# Altium PCB Wings_SMD_Breakout_v1.1.PcbDoc (part 1 of 2)
Units mm, origin at the board's own origin, x right, y up, seen from the top; angles counter-clockwise.
Board outline 50.8 x 30 mm, 2 copper layers (Top Layer, Bottom Layer), stack 1.569 mm thick; 52 components, 60 nets, 219 pads, 125 vias.
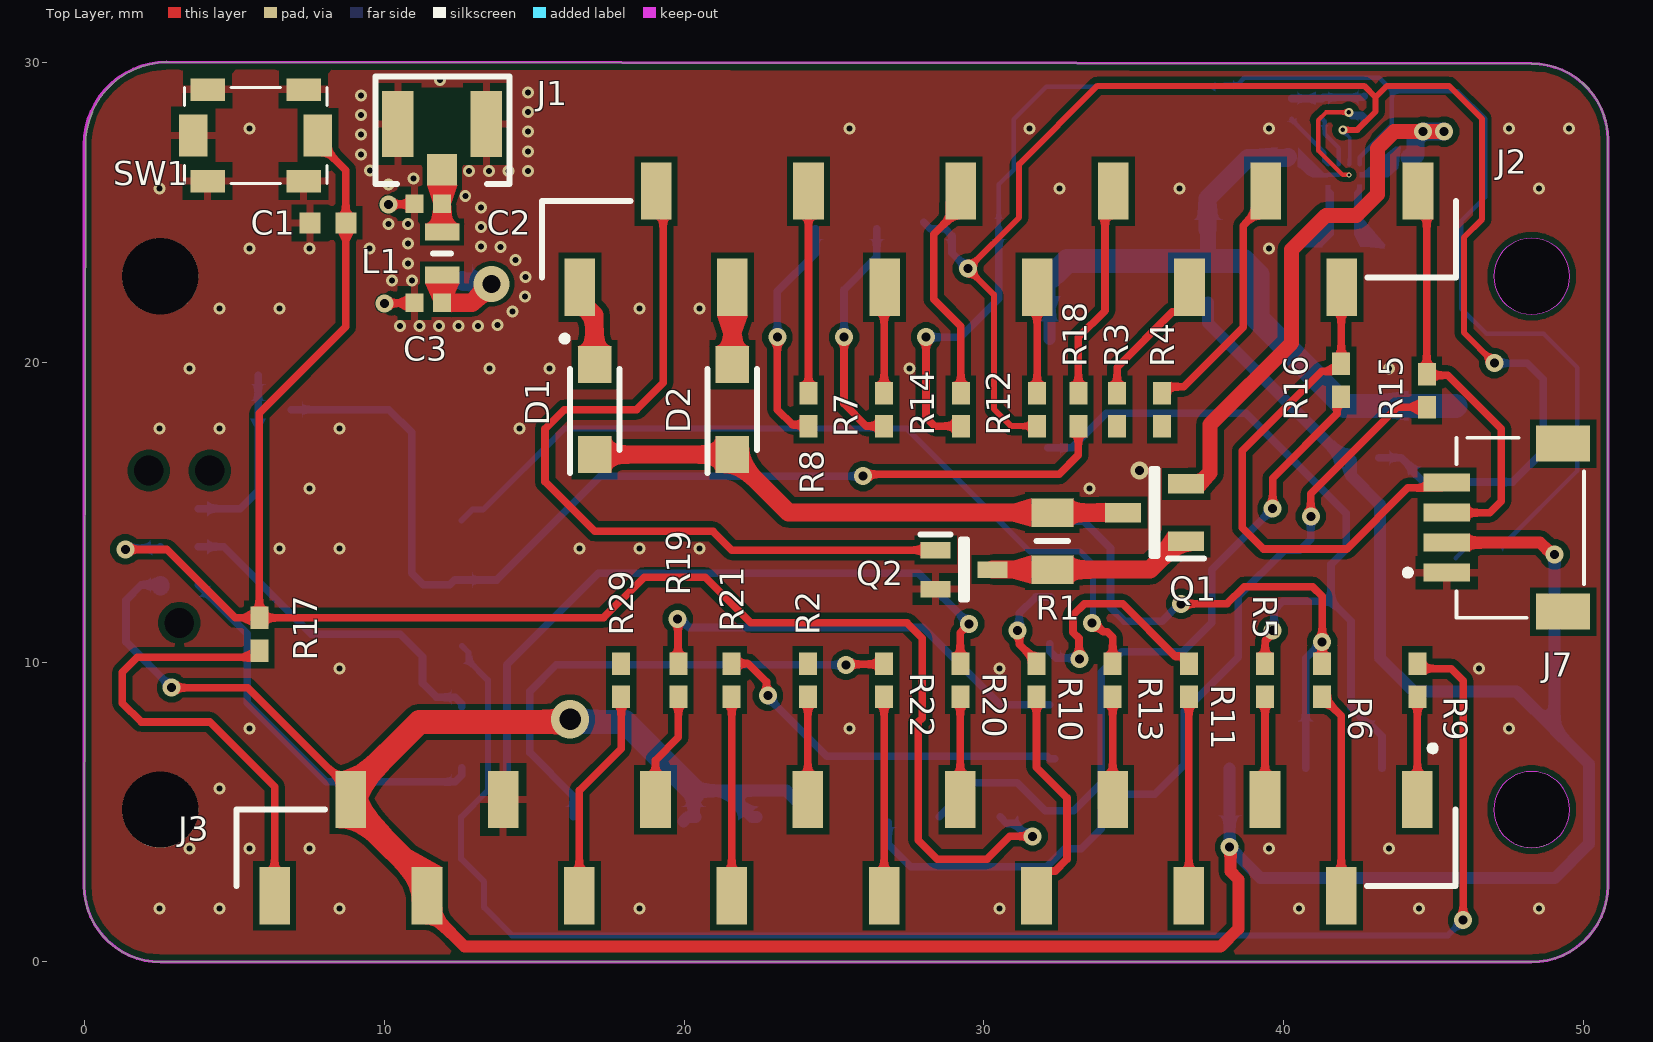
[diagram p0: Top Layer view]
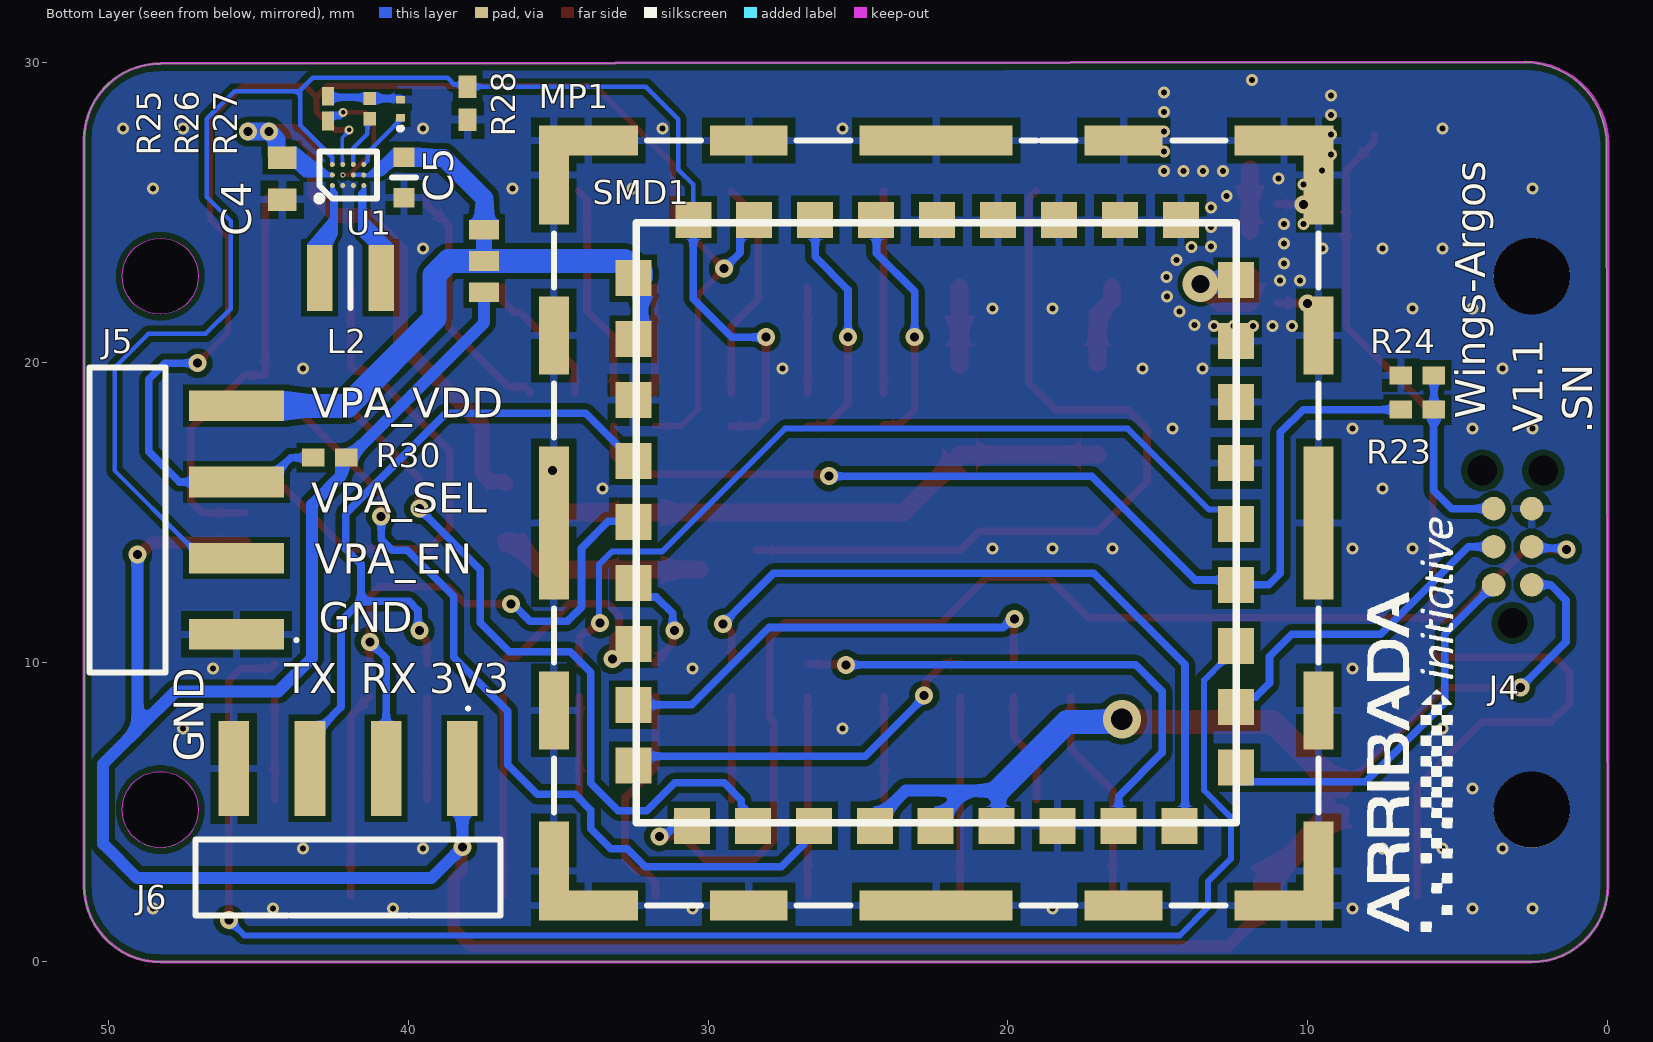
[diagram p1: Bottom Layer view, seen from below]
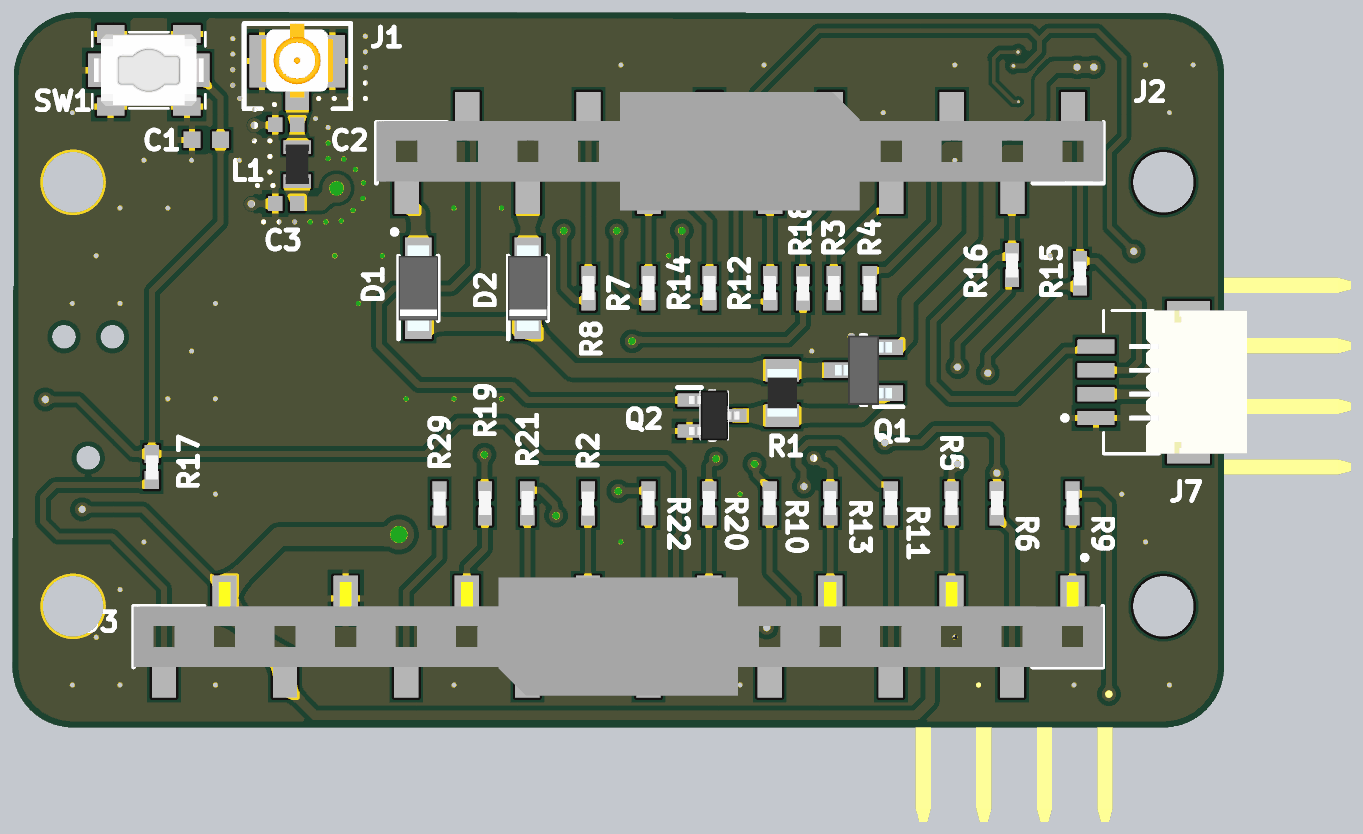
[diagram p2: 3D render of the assembled board from above, using the file's embedded part models]
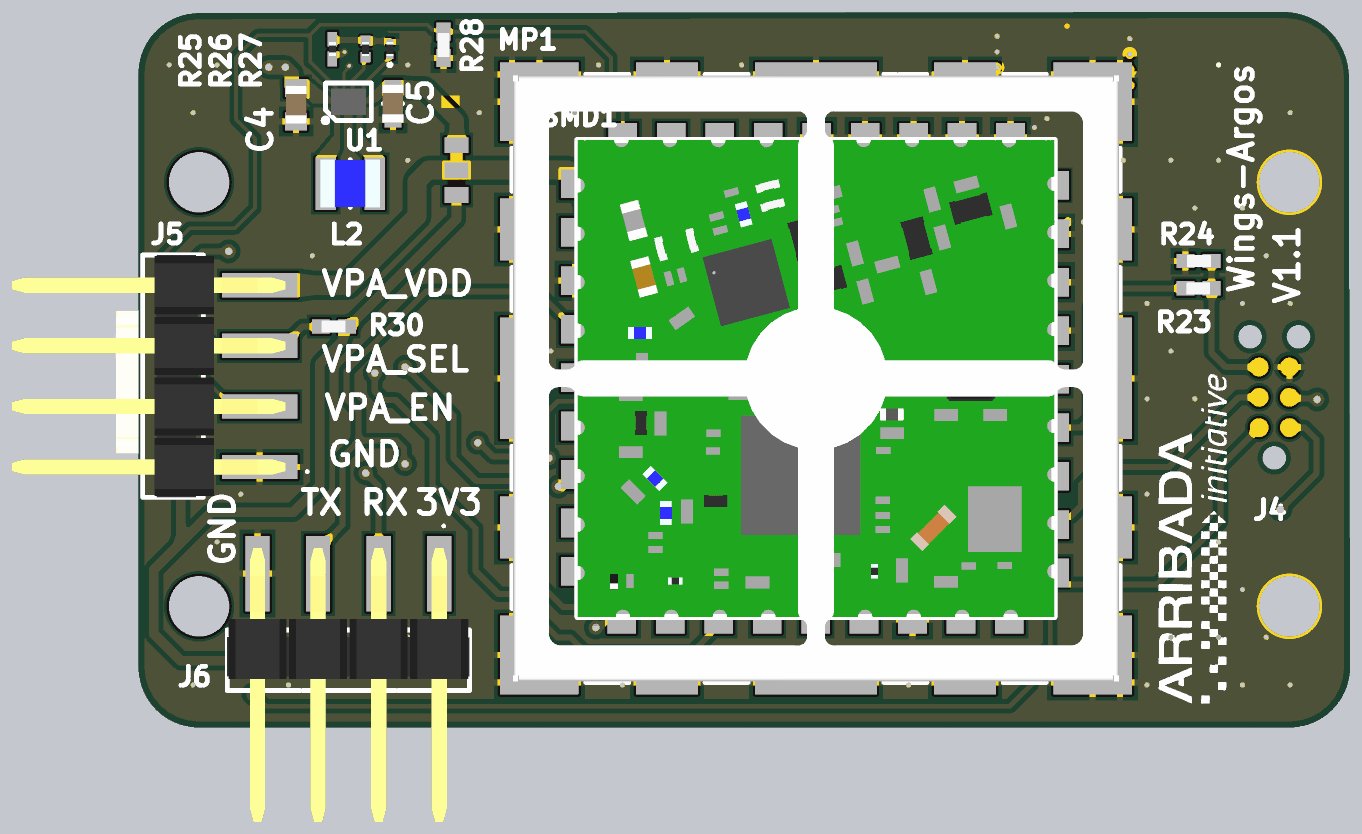
[diagram p3: 3D render of the assembled board from below, using the file's embedded part models]

## Layer stack, top to bottom
Top Solder: solder mask 0.0254, SM-001, Dk 4
Top Layer: signal copper 0.035
Dielectric 1: core 1.4986, Core-043, Dk 4.3
Bottom Layer: signal copper 0.035
Bottom Solder: solder mask 0.0254, SM-001, Dk 4

## Board outline
2.54,0 cw(c2.54,2.54) 0,2.54 0.05,27.246 cw(c2.804,27.246) 2.804,30 48.26,29.95 cw(c48.26,27.41) 50.8,27.41 50.8,2.54 cw(c48.26,2.54) 48.26,0
cut-out: 48.26,3.81 ccw(c48.26,5.08) 49.53,5.08 ccw(c48.26,5.08) 48.26,6.35 ccw(c48.26,5.08) 46.99,5.08 ccw(c48.26,5.08)
cut-out: 48.26,21.59 ccw(c48.26,22.86) 49.53,22.86 ccw(c48.26,22.86) 48.26,24.13 ccw(c48.26,22.86) 46.99,22.86 ccw(c48.26,22.86)

## Design rules (kind name [scope] priority, off if disabled: settings)
AcuteAngle [All] p1: minimum=6.00000000000000E+0001 checktracksonly=FALSE
Clearance Clearance_1 [TouchesRoom('Room_opt') and InNet('VPA_VDD') vs TouchesRoom('Room_opt') and InNet('NetC5_1')] p1: gap=0 ignorepadtopadclearanceinfootprint=FALSE
Clearance Clearance_Pad_TPS [TouchesRoom('TPS63901')] p2: gap=0.15 ignorepadtopadclearanceinfootprint=FALSE except(0.254: Hole-Hole)
Clearance Clearance_RF [InNetClass('50Ohms')] p3: gap=0.15 ignorepadtopadclearanceinfootprint=FALSE
Clearance [All] p4: gap=0.2 ignorepadtopadclearanceinfootprint=FALSE except(0.15: Arc-SMDPad Track-SMDPad SMDPad-SMDPad THPad-THPad; 0.254: Hole-Hole)
MinimumSolderMaskSliver [All] p1: minsoldermaskwidth=0.1
PlaneClearance PlaneClearance_GND [InNet('GND')] p1: clearance=0
PlaneClearance [All] p2: clearance=0.508
PlaneConnect PlaneConnect_GND [InNet('GND')] p1: pad.planeconnectstyle=Relief pad.reliefexpansion=0.508 pad.reliefentries=4 pad.reliefconductorwidth=0.254 pad.reliefairgap=0.254 via.planeconnectstyle=Direct via.reliefexpansion=0.508 via.reliefentries=4 via.reliefconductorwidth=0.254 via.reliefairgap=0.254
PlaneConnect [All] p2: planeconnectstyle=Relief reliefexpansion=0.508 reliefentries=4 reliefconductorwidth=0.254 reliefairgap=0.254
PolygonConnect PolygonConnect_GND_TPS [(ObjectKind = 'Pad') And (Net = 'GND') And (Component = 'U1') vs InNet('GND')] p1: connectstyle=Direct reliefconductorwidth=0.254 reliefentries=4 polygonreliefangle="90 Angle" airgapwidth=0.254
PolygonConnect PolygonConnect_GND [InNet('GND') vs InNet('GND')] p2: thpad.connectstyle=Direct thpad.reliefconductorwidth=0.254 thpad.reliefentries=4 thpad.polygonreliefangle="90 Angle" thpad.airgapwidth=0.254 smdpad.connectstyle=Relief smdpad.reliefconductorwidth=0.254 smdpad.reliefentries=4 smdpad.polygonreliefangle="90 Angle" smdpad.airgapwidth=0.254 via.connectstyle=Direct via.reliefconductorwidth=0.254 via.reliefentries=4 via.polygonreliefangle="90 Angle" via.airgapwidth=0.254
PolygonConnect [All] p3: connectstyle=Relief reliefconductorwidth=0.254 reliefentries=4 polygonreliefangle="90 Angle" airgapwidth=0.254
RoomDefinition Room_opt [False vs False] p1: confinementstyle=ConfineIn formatcopy=TRUE lockcomponents=FALSE outline 36.529,21.831 38.199,21.831 38.199,25.187 36.529,25.187
RoomDefinition TPS63901 [False] p2: confinementstyle=ConfineIn formatcopy=TRUE lockcomponents=FALSE outline 40.767,25.538 43.484,25.538 43.484,27.305 40.767,27.305
RoutingPriority RoutingPWR [InNetClass('PWR')] p1: routingpriority=0
RoutingPriority RoutingDBG [InNetClass('UART')] p2: routingpriority=1
RoutingPriority RoutingSPI [All] p3: routingpriority=3
RoutingPriority RoutingI2C [All] p4: routingpriority=2
RoutingPriority RoutingDiGI [All] p5: routingpriority=5
RoutingPriority RoutingANALOG [All] p6: routingpriority=4
RoutingPriority RoutingALL [All] p7: routingpriority=6
RoutingVias [All] p1: holewidth=0.711 width=1.27 viastyle="Through Hole" minholewidth=0.3 minwidth=0.6 maxholewidth=0.711 maxwidth=1.27
ShortCircuit ShortCircuit_1 [TouchesRoom('Room_opt') and InNet('VPA_VDD') vs TouchesRoom('Room_opt') and InNet('NetC5_1')] p1: allowed=TRUE
ShortCircuit [All] p2: allowed=FALSE
SilkToSolderMaskClearance [IsPad] p1: minsilkscreentomaskgap=0 clearancetoexposedcopper=TRUE
SolderMaskExpansion SolderMaskExpansion_VIA_tented [(ObjectKind = 'Via')] p1: expansion=0.102 istentingtop=TRUE
SolderMaskExpansion [All] p2: expansion=0.102 istentingtop=FALSE
SupplyNets "Schematic Supply Nets_6" [InNet('VBAT')] p1: voltage=0.000
SupplyNets "Schematic Supply Nets_5" [InNet('GND')] p2: voltage=0.000
SupplyNets "Schematic Supply Nets_4" [InNet('VDD')] p3: voltage=0.000
SupplyNets "Schematic Supply Nets_2" [InNet('VPA_VDD')] p4: voltage=0.000
SupplyNets "Schematic Supply Nets_1" [InNet('F_3V3')] p5: voltage=0.000
SupplyNets "Schematic Supply Nets" [InNet('VBUS')] p6: voltage=0.000
Width Width_RF [InNetClass('50Ohms')] p1: maxlimit=0.8 minlimit=0.254 preferedwidth=0.6 minimp=50.000000 maximp=50.000000 favimp=50.000000
Width [All] p2: maxlimit=1 minlimit=0.1 preferedwidth=0.254 minimp=50.000000 maximp=50.000000 favimp=50.000000
24 further rules are at their usual default settings.

## Classes and differential pairs
net class 50Ohms: NetC2_2 NetC3_1
component class U_TPS63901: C4 C5 L2 R25 R26 R27 U1

## Components (designator, comment, footprint, x,y, rotation, side; value= is the part's Value field where it differs from the comment)
C1 "GRM155R71C104KA88D" 0402 7.493,24.638 r0 top value=100nF
C2 "NC" CAPC1005X55N 11.478,25.273 r0 top
C3 "CC0402BRNPO9BN3R6" CAPC1005X55N 11.478,21.971 r180 top value=3.6pF
C4 "GRM188R61A106MAALJ" CAPC1608X90N 44.194,26.113 r270 bottom value=10uF (schematic designator C1)
C5 "GRM188R61A226ME15D" GRM18x 40.132,26.158 r270 bottom value=22uF (schematic designator C2)
D1 "MBR120LSFT3G" SODFL3616X98N 17.018,18.415 r90 top
D2 "MBR120LSFT3G" SODFL3616X98N 21.61,18.415 r90 top
J1 "20279-001E-01" "MHF SMT REC" 11.938,27.94 r270 top
J2 "SSM-112-F-SV-P-TR" SAMTEC_SSM-112-F-SV-P-TR 30.5,24.096 r180 top
J3 "SSM-116-F-SV-P-TR" SAMTEC_SSM-116-F-SV-P-TR 25.4,3.81 r0 top
J4 "TC2030-NL" TC2030NL 3.175,11.303 r90 bottom
J5 "M20-8890445R" M208890445R 51.173,14.732 r90 bottom
J6 "M20-8890445R" M208890445R 42,1 r0 bottom (schematic designator J7)
J7 "PRT-14417" SPARKFUN_PRT-14417 47.879,14.478 r90 top (schematic designator J6)
L1 "LQW18AN18NG8ZD" LQW18AN10NG80D 11.938,23.622 r90 top value=18nH
L2 "DFE252012F-2R2M=P2" DFE2HCAH1R0MJ0L 41.922,22.809 r180 bottom value=2.2uH (schematic designator L1)
MP1 "36103255S" 36103255S 22.392,14.638 r180 bottom
Q1 "DMG3415U-7" SOT96P240X120-3N 35.687,14.981 r180 top
Q2 "BSS138BKW,115" SOT65P210X110-3N 29.337,13.081 r0 top
R1 "RC0805JR07100KL" RESC2012X60N 32.278,14.031 r270 top value=100kR
R2 "0R" RESC1005X40N 24.13,9.398 r270 top value=0mR
R3 "0R" RESC1005X40N 34.437,18.415 r90 top value=0mR
R4 "0R" RESC1005X40N 35.941,18.415 r90 top value=0mR
R5 "0R" RESC1005X40N 39.37,9.398 r90 top value=0mR
R6 "0R" RESC1005X40N 41.275,9.398 r90 top value=0mR
R7 "0R" RESC1005X40N 26.67,18.415 r90 top value=0mR
R8 "0R" RESC1005X40N 24.15,18.415 r90 top value=0mR
R9 "0R" RESC1005X40N 44.45,9.398 r90 top value=0mR (schematic designator R13)
R10 "0R" RESC1005X40N 31.75,9.398 r90 top value=0mR (schematic designator R19)
R11 "0R" RESC1005X40N 36.83,9.398 r90 top value=0mR (schematic designator R20)
R12 "0R" RESC1005X40N 31.77,18.415 r90 top value=0mR (schematic designator R9)
R13 "0R" RESC1005X40N 34.29,9.398 r90 top value=0mR (schematic designator R11)
R14 "0R" RESC1005X40N 29.23,18.415 r90 top value=0mR (schematic designator R10)
R15 "0R" RESC1005X40N 44.762,19.047 r270 top value=0mR (schematic designator R14)
R16 "0R" RESC1005X40N 41.91,19.388 r270 top value=0mR
R17 "0R" RESC1005X40N 5.842,10.922 r270 top value=0mR
R18 "0R" RESC1005X40N 33.147,18.415 r270 top value=0mR (schematic designator R12)
R19 "0R" RESC1005X40N 19.812,9.398 r90 top value=0mR (schematic designator R21)
R20 "0R" RESC1005X40N 29.21,9.398 r90 top value=0mR (schematic designator R15)
R21 "0R" RESC1005X40N 21.59,9.398 r90 top value=0mR (schematic designator R22)
R22 "0R" RESC1005X40N 26.67,9.398 r90 top value=0mR (schematic designator R18)
R23 "0R" RESC1005X40N 6.35,18.415 r0 bottom value=0mR
R24 "0R" RESC1005X40N 6.35,19.558 r180 bottom value=0mR
R25 "CRCW020136K5FNED" RESC0603X28N 42.672,28.448 r90 bottom value=36.5KR (schematic designator R1)
R26 "RC0201FR-070RL" RESC0603X26N 41.275,28.448 r90 bottom value=0R (schematic designator R2)
R27 "ERJ-1GNF1622C" ERJ1GN_(0201) 40.259,28.448 r90 bottom value=16.2kR (schematic designator R3)
R28 "CRCW040210K0JNEDC" RESC1005X40N 38.01,28.629 r270 bottom value=10kR (schematic designator R26)
R29 "0R" RESC1005X40N 17.907,9.398 r270 top value=0mR (schematic designator R25)
R30 "CRCW040210K0JNEDC" RESC1005X40N 42.609,16.812 r0 bottom value=10kR (schematic designator R27)
SMD1 "stm32wl-SMD" stm32wl-SMD_shortlegs 32.392,4.638 r180 bottom
SW1 "PTS820J2x" TL1015 5.715,27.559 r0 top
U1 "TPS63901YCJR" BGA12C35P3X4_111X146X35 42.001,26.238 r90 bottom

## Footprints (in the part's own frame and the unit in brackets; to place one, negate y for a bottom-side part, rotate by r counter-clockwise, add the part's x,y. Pads: shape width x height; smd on the part's side, far side on the other; paste and mask are expansions set on the pad)
0402 [mm]
  rect 0.7x0.7 smd: 1(0.035,0) 2(1.233,0)
  body extent -0.38,-0.36 1.65,0.36, height 0.82
36103255S [mm] "Shielding Cabinet, SMD Frame, 25.4x25.4mm"
  rect 1x3.3 smd: 1(-12.75,-11.6) 1(-12.75,11.6) 1(12.75,-11.6) 1(12.75,11.6)
  rect 1x2.6 smd: 1(-12.75,-6.25) 1(-12.75,6.25) 1(12.75,-6.25) 1(12.75,6.25)
  rect 1x5.1 smd: 1(-12.75,0) 1(12.75,0)
  rect 3.3x1 smd: 1(-11.6,-12.75) 1(-11.6,12.75) 1(11.6,-12.75) 1(11.6,12.75)
  rect 2.6x1 smd: 1(-6.25,-12.75) 1(-6.25,12.75) 1(6.25,-12.75) 1(6.25,12.75)
  rect 5.1x1 smd: 1(0,-12.75) 1(0,12.75)
  silkscreen extent -12.75,-12.75 12.75,12.75, body extent -12.7,-12.7 12.7,12.7, height 3.2
BGA12C35P3X4_111X146X35 [mm]
  round 0.169 smd: A1(-0.35,0.525) A2(0,0.525) A3(0.35,0.525) B1(-0.35,0.175) B2(0,0.175) B3(0.35,0.175) C1(-0.35,-0.175) C2(0,-0.175) C3(0.35,-0.175) D1(-0.35,-0.525) D2(0,-0.525) D3(0.35,-0.525)
  silkscreen extent -0.88,-0.96 0.78,1.06, body extent -0.56,-0.73 0.56,0.73, height 0.35
CAPC1005X55N [mm]
  rect 0.6x0.62 smd: 1(-0.46,0) 2(0.46,0)
  body extent -0.5,-0.25 0.5,0.25, height 0.55
CAPC1608X90N [mm]
  rect 0.75x0.94 smd: 1(-0.7,0) 2(0.7,0)
  body extent -0.8,-0.45 0.8,0.45, height 0.8
DFE2HCAH1R0MJ0L [mm]
  rect 0.85x2.2 smd: 1(-1.025,0) 2(1.025,0)
  silkscreen extent 0,-1 0,1, body extent -1.25,-1 1.25,1, height 1.2
ERJ1GN_(0201) [mm]
  rect 0.25x0.3 smd: 1(-0.3,0) 2(0.3,0)
  silkscreen extent -0.7,-0.05 -0.63,0.05, body extent -0.3,-0.15 0.3,0.15, height 0.23
GRM18x [mm]
  rect 0.65x0.7 smd: 1(-0.675,0) 2(0.675,0)
  silkscreen extent 0,-0.4 0,0.4, body extent -0.8,-0.45 0.8,0.45, height 0.8
LQW18AN10NG80D [mm]
  rect 0.57x1.15 smd: 1(-0.715,0) 2(0.715,0)
  silkscreen extent 0,-0.3 0,0.3, body extent -0.82,-0.5 0.82,0.5, height 0.9
M208890445R [mm]
  rect 1.02x3.17 smd: 1(-3.81,-5.453) 2(-1.27,-5.453) 3(1.27,-5.453) 4(3.81,-5.453)
  silkscreen extent -5.08,-7.5 5.08,-0.55, body extent -5.08,-6.54 5.08,4.96, height 2.5
"MHF SMT REC" [mm]
  rect 1.05x1 smd: 1(1.525,0)
  rect 2.2x1.05 smd: 2(0,1.475) 3(0,-1.475)
  Top Layer pour cut-out: -1.2,0.95 1,0.95 1,-0.95 -1.2,-0.95
  silkscreen extent -1.58,-2.22 2,2.25, body extent -1.57,-1.5 1.53,1.5, height 1.27
RESC0603X26N [mm]
  rect 0.44x0.42 smd: 1(-0.34,0) 2(0.34,0)
  body extent -0.3,-0.15 0.3,0.15, height 0.26
RESC0603X28N [mm]
  rect 0.625x0.4 smd: 1(-0.412,0) 2(0.412,0)
  body extent -0.3,-0.15 0.3,0.15, height 0.28
RESC1005X40N [mm]
  rect 0.75x0.6 smd: 1(-0.55,0) 2(0.55,0)
  body extent -0.49,-0.25 0.51,0.25, height 0.35
RESC2012X60N [mm]
  rect 0.95x1.4 smd: 1(-0.95,0) 2(0.95,0)
  silkscreen extent 0,-0.53 0,0.53, body extent -1,-0.63 1,0.63, height 0.6
SAMTEC_SSM-112-F-SV-P-TR [mm]
  rect 1.02x1.905 smd: 01(13.97,1.603) 02(11.43,-1.603) 03(8.89,1.603) 04(6.35,-1.603) 05(3.81,1.603) 06(1.27,-1.603) 07(-1.27,1.603) 08(-3.81,-1.603) 09(-6.35,1.603) 10(-8.89,-1.603) 11(-11.43,1.603) 12(-13.97,-1.603)
  silkscreen extent -15.24,-1.27 15.24,3.41, body extent -15.24,-2.54 15.24,2.41, height 8.64
SAMTEC_SSM-116-F-SV-P-TR [mm]
  rect 1.02x1.905 smd: 01(19.05,1.603) 02(16.51,-1.603) 03(13.97,1.603) 04(11.43,-1.603) 05(8.89,1.603) 06(6.35,-1.603) 07(3.81,1.603) 08(1.27,-1.603) 09(-1.27,1.603) 10(-3.81,-1.603) 11(-6.35,1.603) 12(-8.89,-1.603) 13(-11.43,1.603) 14(-13.97,-1.603) 15(-16.51,1.603) 16(-19.05,-1.603)
  silkscreen extent -20.32,-1.27 20.32,3.41, body extent -20.32,-2.48 20.32,2.48, height 8.64
SODFL3616X98N [mm]
  rect 1.24x1.12 smd: 1(-1.5,0) 2(1.5,0)
  silkscreen extent -2.12,-0.82 1.35,0.82, body extent -1.8,-0.82 1.8,0.82, height 0.98
SOT65P210X110-3N [mm]
  rect 1x0.55 smd: 1(-0.95,0.65) 2(-0.95,-0.65) 3(0.95,0)
  silkscreen extent -1.45,-1 0.1,1.17, body extent -0.96,-1.05 1.14,1.05, height 0.93
SOT96P240X120-3N [mm]
  rect 1.2x0.65 smd: 1(-1.05,0.96) 2(-1.05,-0.96) 3(1.05,0)
  silkscreen extent -1.65,-1.45 0.1,1.54, body extent -1.2,-1.45 1.2,1.45, height 1.2
SPARKFUN_PRT-14417 [mm]
  rect 0.6x1.55 smd: 1(-1.5,2.45) 2(-0.5,2.45) 3(0.5,2.45) 4(1.5,2.45)
  rect 1.2x1.8 smd: S1(-2.8,-1.425) S2(2.8,-1.425)
  silkscreen extent -3,-2.12 3,3.85, body extent -3,-3.9 3,1.05, height 3.25
stm32wl-SMD_shortlegs [mm]
  rect 1.2x1.2 smd: 0(-0.1,1.905) 1(-0.1,3.937) 2(-0.1,5.969) 3(-0.1,8.001) 4(-0.1,10.033) 5(-0.1,12.065) 6(-0.1,14.097) 7(-0.1,16.129) 8(-0.1,18.161) 9(1.9,20.1) 10(3.932,20.1) 11(5.964,20.1) 12(7.996,20.1) 13(10.028,20.1) 14(12.06,20.1) 15(14.092,20.1) 16(16.124,20.1) 17(18.156,20.1) 18(20,18.095) 19(20,16.063) 20(20,14.031) 21(20,11.999) 22(20,9.967) 23(20,7.935) 24(20,5.903) 25(20,3.871) 26(20,1.839) 27(18.111,-0.1) 28(16.079,-0.1) 29(14.047,-0.1) 30(12.015,-0.1) 31(9.983,-0.1) 32(7.951,-0.1) 33(5.919,-0.1) 34(3.887,-0.1) 35(1.855,-0.1)
  silkscreen extent 0,0 20,20, body extent 0,0 20,20, height 2.05
TC2030NL [mm]
  round 0.787 smd paste-0.787: 1(1.27,-0.635) 2(1.27,0.635) 3(2.54,-0.635) 4(2.54,0.635) 5(3.81,-0.635) 6(3.81,0.635)
  round 0.65 hole 0.991 unplated: H1(0,0) H2(5.08,1.016) H3(5.08,-1.016)
TL1015 [mm]
  rect 0.95x1.4 smd: 1(-2.075,0) 2(2.075,0)
  rect 1.15x0.75 smd: G1(-1.6,1.525) G2(1.6,1.525) G3(1.6,-1.525) G4(-1.6,-1.525)
  silkscreen extent -2.37,-1.6 2.37,1.6, body extent -2.3,-1.5 2.3,1.5, height 2

## Part data
C1: "Multilayer Ceramic Capacitors MLCC - SMD/SMT 0.1 uF 16 VDC 10% 0402 X7R", Capacitance=100nF, Case Code (Imperial)=0402, Case Code (Metric)=1005, Dielectric=X7R, Dielectric Material=Ceramic, Manufacturer=YAGEO, Manufacturer 1=Murata, Manufacturer_Part_Number=CC0402KRX7R7BB104, Max Operating Temperature=125°C, Min Operating Temperature=-55°C, Package=C0402, Package Quantity=1, Supplier Part Number 1=81-GRM155R71C104KA88, TOLERANCE=10%, Voltage=16V, Case/Package=0402, Category 1="Ceramic Capacitors", ComponentLink1Description=https://datasheet.ciiva.com/129/grm155r71c104ka88-01-129739.pdf?src-supplier=Digi-Key, ComponentLink1URL=https://datasheet.ciiva.com/129/grm155r71c104ka88-01-129739.pdf?src-supplier=Digi-Key, ComponentLink2Description=https://datasheet.ciiva.com/129/grm155r71c104ka88-01-129740.pdf?src-supplier=Digi-Key, ComponentLink2URL=https://datasheet.ciiva.com/129/grm155r71c104ka88-01-129740.pdf?src-supplier=Digi-Key, ComponentLink3Description=https://datasheet.ciiva.com/29199/454098-da-01-en-vs-kondensator-0402-29199799.pdf?src-supplier=Conrad, ComponentLink3URL=https://datasheet.ciiva.com/29199/454098-da-01-en-vs-kondensator-0402-29199799.pdf?src-supplier=Conrad, ComponentLink4Description=https://datasheet.ciiva.com/7937/4360-7937615.pdf?src-supplier=Element14, ComponentLink4URL=https://datasheet.ciiva.com/7937/4360-7937615.pdf?src-supplier=Element14, ComponentLink5Description=https://datasheet.ciiva.com/14116/grmseries-highdielectrictype-eng-14116878.pdf?src-supplier=Distrelec, ComponentLink5URL=https://datasheet.ciiva.com/14116/grmseries-highdielectrictype-eng-14116878.pdf?src-supplier=Distrelec, ComponentLink6Description=https://datasheet.ciiva.com/14103/grmseries-highdielectrictype-eng-14103750.pdf?src-supplier=Distrelec, ComponentLink6URL=https://datasheet.ciiva.com/14103/grmseries-highdielectrictype-eng-14103750.pdf?src-supplier=Distrelec, ComponentLink7Description=https://datasheet.ciiva.com/28534/4360-28534127.pdf?src-supplier=Element14, ComponentLink7URL=https://datasheet.ciiva.com/28534/4360-28534127.pdf?src-supplier=Element14, ComponentLink8Description=https://datasheet.ciiva.com/28534/4360-28534133.pdf?src-supplier=Element14, ComponentLink8URL=https://datasheet.ciiva.com/28534/4360-28534133.pdf?src-supplier=Element14, Depth=0.5mm, Description 1="0402 0.1 uF 16V ±10 % Tolerance X7R SMT Multilayer Ceramic Capacitor", Height=0.5mm, Lead Free="Lead Free", Length=1mm, Manufacturer Part Number 1=GRM155R71C104KA88D, Material=Ceramic, Mount="Surface Mount", Number of Pins=2, Packaging="Tape and Reel", Pricing 1="1=0,1, 10=0,017, 50=0,017, 100=0,01, 1000=0,008, 10000=0,005 (USD)", Radiation Hardening=No, Reach SVHC Compliant=Unknown, RoHS 1=Yes, RoHS Compliant=Yes, Series=GRM, Stock 1=7816691, Supplier 1=Mouser, Termination=SMD/SMT, Thickness=0.022inch, Voltage Rating=16V, Voltage Rating (DC)=16V, Width=0.02inch
C2: library part GEN_CAP_0402, "Generic capacitor", ComponentLink1Description=Mouser, ComponentLink1URL=https://www.mouser.fr/ProductDetail/Murata-Electronics/GCM1555C1H4R7CA16D?qs=jDWTHf1mkXZYnVNtgyfFgw%3D%3D
C3: "Multilayer Ceramic Capacitors MLCC - SMD/SMT 50 V 3.6pF C0G 0402 Tol 0.1pF", Manufacturer_Name=KEMET, Mouser Part Number=603-CC402BRNPO9BN3R6, Arrow Part Number=CC0402BRNPO9BN3R6, Arrow Price/Stock=https://www.arrow.com/en/products/cc0402brnpo9bn3r6/yageo, Datasheet Link=https://www.yageo.com/upload/media/product/productsearch/datasheet/mlcc/UPY-GP_NP0_16V-to-50V_18.pdf, Height=0.55mm, Manufacturer_Part_Number=CC0402BRNPO9BN3R6, Mouser Price/Stock=https://www.mouser.co.uk/ProductDetail/Yageo/CC0402BRNPO9BN3R6?qs=57cj7OiSijl%2FHGuB4N4%2Few%3D%3D
C4: "Multilayer Ceramic Capacitors MLCC - SMD/SMT 10 uF 10 VDC 20% 0603 X5R", Manufacturer_Name="Murata Electronics", Mouser Part Number=81-GRM188R61A106MALJ, Arrow Part Number=GRM188R61A106MAALJ, Arrow Price/Stock=https://www.arrow.com/en/products/grm188r61a106maalj/murata-manufacturing, Datasheet Link=https://psearch.en.murata.com/capacitor/product/GRM188R61A106MAAL%23.html, Height=0.9mm, Manufacturer_Part_Number=GRM188R61A106MAALJ, Mouser Price/Stock=https://www.mouser.co.uk/ProductDetail/Murata-Electronics/GRM188R61A106MAALJ?qs=hNud%2FORuBR0Lq8imX%2F1lYQ%3D%3D
C5: "Multilayer Ceramic Capacitors MLCC - SMD/SMT 22 uF 10 VDC 20% 0603 X5R", Manufacturer_Name="Murata Electronics", Mouser Part Number=81-GRM188R61A226ME5D, Arrow Part Number=GRM188R61A226ME15D, Arrow Price/Stock=https://www.arrow.com/en/products/grm188r61a226me15d/murata-manufacturing?region=nac, Datasheet Link=https://search.murata.co.jp/Ceramy/image/img/A01X/G101/ENG/GRM188R61A226ME15-02A.pdf, Height=0.8mm, Manufacturer_Part_Number=GRM188R61A226ME15D, Mouser Price/Stock=https://www.mouser.co.uk/ProductDetail/Murata-Electronics/GRM188R61A226ME15D?qs=eeBpzGFlv%252B8DV%2FrilzyhAw%3D%3D
D1 D2: "Schottky Diodes & Rectifiers 1A 20V", Manufacturer_Name=onsemi, Mouser Part Number=863-MBR120LSFT3G, Arrow Part Number=MBR120LSFT3G, Arrow Price/Stock=https://www.arrow.com/en/products/mbr120lsft3g/on-semiconductor?region=nac, Datasheet Link=http://www.onsemi.com/pub/Collateral/MBR120LSFT1-D.PDF, Height=0.98mm, Manufacturer_Part_Number=MBR120LSFT3G, Mouser Price/Stock=https://www.mouser.co.uk/ProductDetail/onsemi/MBR120LSFT3G?qs=3JMERSakebrl0QzFyBgvHg%3D%3D
J1: "CON IPEX MHF SMT RECEPTACLE RF DC - 6GHZ VSWR: 1.3 max. at 0.1-3GHz; VSWR: 1.5 max. at 3-6GHz", Frequency Range="DC - 6GHz", Manufacturer=Taoglas, Manufacturers Part Number=RECE-20279-001E-01, Supplier Part Number 1=931-1107-1-ND, Distributor 1=EBV, Distributor 2="Future Electronics", Size=MHF, Supplier 1=Digi-Key, Supplier 2=Mouser, Supplier Part Number 2=960-RECE20279001E01
J2: "Headers & Wire Housings Surface Mount, 12pos, PCB Socket Strips, .100\" pitch"
J3: "Headers & Wire Housings Surface Mount, 16pos,  PCB Socket Strips, .100\" pitch", Supplier Part Number 1=SSM-116-F-SV-P-ND, Supplier 1=Digi-Key, Supplier 2=Digi-Key, Supplier Part Number 2=SSM-116-F-SV-ND
J4: "CON PLUG OF NAILS 6 PIN FOOTPRINT NO LEGS", Manufacturer=Tag-Connect, Manufacturers Part Number="NOT FITTED PART", Distributor 1=EBV, Distributor 2="Future Electronics", Supplier Part Number 1="NOT FITTED PART", Supplier Part Number 2="NOT FITTED PART"
J5 J6: "Connector", Manufacturer_Name=Harwin, Mouser Part Number=855-M20-8890445R, Datasheet Link=https://cdn.harwin.com/pdfs/M20-889.pdf, Height=2.65mm, Manufacturer_Part_Number=M20-8890445R, Mouser Price/Stock=https://www.mouser.co.uk/ProductDetail/Harwin/M20-8890445R?qs=k41KVqW3ymoiw3ZBsQPrmw%3D%3D
J7: "QWIIC JST CONNECTOR - SMD 4-PIN", Package=None, Check_prices=https://www.snapeda.com/parts/PRT-14417/SparkFun+Electronics/view-part/?ref=eda, MF="SparkFun Electronics", MP=PRT-14417, SnapEDA_Link=https://www.snapeda.com/parts/PRT-14417/SparkFun+Electronics/view-part/?ref=snap
L1: "Inductor Wirewound , 18 nH, 75 Milliohm, ± 2%, 1.4 A, 0603 [1608 Metric]", Supplier Part Number 1=81-LQW18AN18NG8ZD, Supplier 1=Mouser
L2: "Inductor Power Chip Shielded Wirewound 2.2uH 20% 1MHz Metal 2.3A 0.082Ohm DCR 1008 T/R", Manufacturer=Murata, Manufacturer Part Number=DFE252012F-2R2M=P2, Supplier Part Number 1=81-DFE252012F-2R2MP2, Category="Fixed Inductors", ComponentLink1Description=http://www.farnell.com/datasheets/2616790.pdf?src-supplier=Farnell, ComponentLink1URL=http://www.farnell.com/datasheets/2616790.pdf?src-supplier=Farnell, ComponentLink2Description=https://www.murata.com/~/media/webrenewal/products/inductor/chip/tokoproducts/wirewoundmetalalloychiptype/m_dfe252012f.ashx?src-supplier=Digikey, ComponentLink2URL=https://www.murata.com/~/media/webrenewal/products/inductor/chip/tokoproducts/wirewoundmetalalloychiptype/m_dfe252012f.ashx?src-supplier=Digikey, ComponentLink3Description=https://datasheet.octopart.com/DFE252012F-2R2M%3DP2-Murata-datasheet-117010004.pdf?src-supplier=Future+Electronics, ComponentLink3URL=https://datasheet.octopart.com/DFE252012F-2R2M%3DP2-Murata-datasheet-117010004.pdf?src-supplier=Future+Electronics, ComponentLink4Description=https://datasheet.octopart.com/DFE252012F-2R2M%3DP2-Murata-datasheet-142691300.pdf?src-supplier=Arrow.cn, ComponentLink4URL=https://datasheet.octopart.com/DFE252012F-2R2M%3DP2-Murata-datasheet-142691300.pdf?src-supplier=Arrow.cn, Pricing 1="1=0,34, 10=0,221, 50=0,221, 100=0,208, 1000=0,208, 10000=0,176 (USD)", RoHS=Yes, Stock 1=84662, Supplier 1=Mouser
MP1: "WE-SHC Shielding Cabinet, SMT Frame, Tin Plated, Tray, 25x25x3mm", Manufacturer="Wurth Elektronik", Operating Temperature Max=125°C, Operating Temperature Min=-40°C, Base Material=Steel, Category="EMC Shielding", ComponentLink1Description="Website Link", ComponentLink1URL=https://www.we-online.com/redexpert/article/36103255S?ad, ComponentLink2Description="Datasheet Link", ComponentLink2URL=https://www.we-online.com/redexpert/spec/36103255S?ad, Height=3mm, Length=25mm, Manufacturer Part Number=36103255S, Match Code=WE-SHC, Mount="Surface Mount", Packaging=Tray, Plating="Tin Plated", type="SMT Frame", Width=25mm
Q1: "MOSFET (P-Channel) 16V Enh FET 8Vgss -12A 0.65W", Manufacturer_Name="Diodes Inc.", Mouser Part Number=621-DMG3415U-7, Arrow Part Number=DMG3415U-7, Arrow Price/Stock=https://www.arrow.com/en/products/dmg3415u-7/diodes-incorporated?region=nac, Datasheet Link=https://datasheet.datasheetarchive.com/originals/distributors/Datasheets-DGA23/1579852.pdf, Height=1.2mm, Manufacturer_Part_Number=DMG3415U-7, Mouser Price/Stock=https://www.mouser.co.uk/ProductDetail/Diodes-Incorporated/DMG3415U-7?qs=oUsD4qhOtFwqFLkI6WCRAA%3D%3D
Q2: "MOSFET (N-Channel)", Manufacturer_Name=Nexperia, Mouser Part Number=771-BSS138BKW115, Arrow Part Number=BSS138BKW,115, Arrow Price/Stock=https://www.arrow.com/en/products/bss138bkw115/nexperia?region=nac, Datasheet Link=https://assets.nexperia.com/documents/data-sheet/BSS138BKW.pdf, Height=1.1mm, Manufacturer_Part_Number=BSS138BKW,115, Mouser Price/Stock=https://www.mouser.co.uk/ProductDetail/Nexperia/BSS138BKW115?qs=A1cBxND5mHJ1Grk7RQmcgg%3D%3D
R1: "Thick Film Resistors - SMD 100 kOhms 125 mW 0805 5%", Manufacturer_Name=KEMET, Arrow Part Number=RC0805JR07100KL, Arrow Price/Stock=https://www.arrow.com/en/products/rc0805jr-07100kl/yageo?region=nac, Datasheet Link=https://www.yageo.com/upload/media/product/productsearch/datasheet/rchip/PYu-RC_Group_51_RoHS_L_11.pdf, Height=0.6mm, Manufacturer_Part_Number=RC0805JR07100KL
R2 R3 R4 R5 R6 R7 R8 R9 R10 R11 R12 R13 R14 R15 R16 R17 R18 R19 R20 R21 R22 R23 R24 R29: library part CRCW04020000Z0ED, "Thick Film Resistors  - SMD 0402 0.063 W 0 Ohm Jumper", Case Code (Imperial)=0402, Case Code (Metric)=1005, Manufacturer 1=Vishay, Max Operating Temperature=155°C, Max Power Dissipation=63mW, Min Operating Temperature=-55°C, Package Quantity=10000, Ratings=AEC-Q200, Resistance=0mR, Resistor Type="Thick Film", Supplier Part Number 1=541-0.0JCT-ND, Temperature Coefficient=100ppm/°C, TOLERANCE=5%, Voltage Rating=50V, Case/Package=0402, Category 1="Chip SMD Resistors", ComponentLink1Description=https://datasheet.ciiva.com/3255/dcrcwe3-3255944.pdf?src-supplier=Avnet, ComponentLink1URL=https://datasheet.ciiva.com/3255/dcrcwe3-3255944.pdf?src-supplier=Avnet, ComponentLink2Description=https://datasheet.ciiva.com/3255/dcrcwe3-3255945.pdf?src-supplier=Avnet, ComponentLink2URL=https://datasheet.ciiva.com/3255/dcrcwe3-3255945.pdf?src-supplier=Avnet, ComponentLink3Description=https://datasheet.ciiva.com/2461/dcrcwe3-2461962.pdf?src-supplier=Digi-Key, ComponentLink3URL=https://datasheet.ciiva.com/2461/dcrcwe3-2461962.pdf?src-supplier=Digi-Key, ComponentLink4Description=https://datasheet.ciiva.com/7841/1720486-7841802.pdf?src-supplier=Element14, ComponentLink4URL=https://datasheet.ciiva.com/7841/1720486-7841802.pdf?src-supplier=Element14, ComponentLink5Description=https://datasheet.ciiva.com/2461/dcrcwe3-2461964.pdf?src-supplier=Digi-Key, ComponentLink5URL=https://datasheet.ciiva.com/2461/dcrcwe3-2461964.pdf?src-supplier=Digi-Key, ComponentLink6Description=https://datasheet.ciiva.com/7841/1697337-7841468.pdf?src-supplier=Element14, ComponentLink6URL=https://datasheet.ciiva.com/7841/1697337-7841468.pdf?src-supplier=Element14, ComponentLink7Description=https://datasheet.ciiva.com/16761/70200976-16761309.pdf?src-supplier=Allied+Electronics, ComponentLink7URL=https://datasheet.ciiva.com/16761/70200976-16761309.pdf?src-supplier=Allied+Electronics, ComponentLink8Description=https://datasheet.ciiva.com/26311/fld-crcw-e3-data-en-26311550.pdf?src-supplier=Distrelec, ComponentLink8URL=https://datasheet.ciiva.com/26311/fld-crcw-e3-data-en-26311550.pdf?src-supplier=Distrelec, Construction=Rectangular, Contact Plating=Tin, Depth=0.5mm, Description 1="CRCW Series 0402 0.063 W 0 Ohm Jumper Surface Mount Thick Film Chip Resistor", Features="Automotive AEC-Q200", Height=0.35mm, Lead Free="Lead Free", Length=1mm, Manufacturer Part Number 1=CRCW04020000Z0ED, Military Standard=Not, Number of Terminations=2, Packaging="Tape and Reel", Power Rating=63mW, Pricing 1="1=0,1, 10=0,029, 25=0,0208, 50=0,016, 100=0,0118, 250=0,009, 500=0,0072, 1000=0,0053, 5000=0,0038 (USD)", Radiation Hardening=No, Reach SVHC Compliant=Unknown, RoHS 1=Yes, RoHS Compliant=Yes, Series=CRCW, Size Code=0402, Stock 1=170588, Supplier 1=Digi-Key, Termination=SMD/SMT, Voltage Rating (DC)=50V, Weight=2.3E-05oz, Width=0.5mm
R25: "Thick Film Resistors - SMD 36.5Kohm 1% 200ppm", Manufacturer_Name=Vishay, Datasheet Link=http://www.vishay.com/docs/20035/dcrcwe3.pdf, Height=0.28mm, Manufacturer_Part_Number=CRCW020136K5FNED
R26: "Thick Film Resistors - SMD 0 Ohms 50mW 0201 1%", Manufacturer_Name=KEMET, Mouser Part Number=603-RC0201FR-070RL, Arrow Part Number=RC0201FR-070RL, Arrow Price/Stock=https://www.arrow.com/en/products/rc0201fr-070rl/yageo?region=nac, Datasheet Link=http://www.yageo.com/documents/recent/PYu-RC0201_51_RoHS_L_8.pdf, Height=0.26mm, Manufacturer_Part_Number=RC0201FR-070RL, Mouser Price/Stock=https://www.mouser.co.uk/ProductDetail/YAGEO/RC0201FR-070RL?qs=LWWr1WFOkdETHfAClQk8Xg%3D%3D
R27: "Thick Film Resistors - SMD 0201 16.2Kohm 1% HalogenFree AEC-Q200", Manufacturer_Name=Panasonic, Mouser Part Number=667-ERJ-1GNF1622C, Datasheet Link=https://industrial.panasonic.com/cdbs/www-data/pdf/RDA0000/AOA0000C301.pdf, Height=0.26mm, Manufacturer_Part_Number=ERJ-1GNF1622C, Mouser Price/Stock=https://www.mouser.co.uk/ProductDetail/Panasonic/ERJ-1GNF1622C?qs=nuXzIS8loXHV%2Fe0uV9zMuw%3D%3D
R28 R30: "Thick Film Resistors - SMD 1/16watt 10Kohms 5% Commercial Use", Case/Package=343Case, Manufacturer="Vishay Semiconductors", Power Rating=63mW, Resistance=10kR, Supplier Part Number 1=71-CRCW040210K0JNEDC, TOLERANCE=5%, Voltage Rating=50V, Category="Chip SMD Resistors", ComponentLink1Description=http://www.vishay.com/docs/28773/crcwce3.pdf?src-supplier=Digikey, ComponentLink1URL=http://www.vishay.com/docs/28773/crcwce3.pdf?src-supplier=Digikey, ComponentLink2Description=https://datasheet.octopart.com/CRCW040210K0JNEDC-Vishay-datasheet-100063072.pdf?src-supplier=Future+Electronics, ComponentLink2URL=https://datasheet.octopart.com/CRCW040210K0JNEDC-Vishay-datasheet-100063072.pdf?src-supplier=Future+Electronics, Height=350um, Lead Free=5697LeadFree, Manufacturer Part Number=CRCW040210K0JNEDC, Pricing 1="1=0,1, 10=0,013, 50=0,013, 100=0,007, 1000=0,005, 10000=0,004 (USD)", RoHS=Yes, Stock 1=229087, Supplier 1=Mouser
SMD1: "Arribada SMD module Argos comunication with PA GR5504"
SW1: "SW SPST PB 50MA 12V SMT CK variant", Manufacturer=C&K, Manufacturers Part Number="PTS820J2xM SMTR LFS", Supplier Part Number 1=611-PTS820J25MSMTR, Distributor 1=EBV, Distributor 2="Future Electronics", Supplier 1=Mouser, Supplier 2=Digi-Key, Supplier Part Number 2=CKN10505CT-ND
U1: "Integrated Circuit", Manufacturer_Name="Texas Instruments", Mouser Part Number=595-TPS63901YCJR, Arrow Part Number=TPS63901YCJR, Arrow Price/Stock=https://www.arrow.com/en/products/tps63901ycjr/texas-instruments?region=nac, Datasheet Link=https://www.ti.com/lit/ds/symlink/tps63901.pdf?ts=1658737279065&ref_url=https%253A%252F%252Fwww.ti.com%252Fproduct%252FTPS63901%253FkeyMatch%253DTPS63901YCJR%2526tisearch%253Dsearch-everything%2526usecase%253DOPN, Height=0.35mm, Manufacturer_Part_Number=TPS63901YCJR, Mouser Price/Stock=https://www.mouser.co.uk/ProductDetail/Texas-Instruments/TPS63901YCJR?qs=vvQtp7zwQdNZy3FE2e2hqg%3D%3D

## Free pads (board coordinates)
  rect 1x0.66 smd far side paste+0: 1(37.465,24.409) 2(37.465,23.368) 3(37.465,22.327)
  round 2.54 hole 2.54 unplated: MH1(48.26,22.86) MH2(48.26,5.08) MH3(2.54,22.86) MH4(2.54,5.08)

## Via types
v1: diameter 0.4/0.4 (per signal layer), hole 0.2, Top Layer to Bottom Layer, tented both sides, 54 vias
v2: diameter 0.4, hole 0.2, Top Layer to Bottom Layer, tented both sides, 29 vias
v3: diameter 0.6, hole 0.3, Top Layer to Bottom Layer, tented both sides, 25 vias
v4: diameter 0.4, hole 0.2, Top Layer to Bottom Layer, tented top, 8 vias
v5: diameter 0.6, hole 0.3, Top Layer to Bottom Layer, tented top, 3 vias
v6: diameter 0.3, hole 0.15, Top Layer to Bottom Layer, tented both sides, 2 vias
v7: diameter 0.169, hole 0.1, Top Layer to Bottom Layer, tented both sides, 1 vias
v8: diameter 0.6, hole 0.3, Top Layer to Bottom Layer, tented bottom, 1 vias
v9: diameter 1.27, hole 0.711, Top Layer to Bottom Layer, tented bottom, 1 vias
v10: diameter 1.2, hole 0.6, Top Layer to Bottom Layer, tented bottom, 1 vias

## Nets (pads, with @x,y where several pads share a name; then routed paths per layer and width w, separated by ;. In a path a pad name is that pad's centre, name@x,y a point inside that pad or via, vN(x,y) a via of type N, cw(c..) or ccw(c..) an arc to the next point about the centre after c; other vN are vias at no path point)
A0: J3.12 R29.2 | length 7.2
  Top Layer w0.254: J3.12 16.51,5.715 17.907,7.112 R29.2
A1: J3.11 R19.1 | length 3.8
  Top Layer w0.254: J3.11 19.05,6.731 19.812,7.493 R19.1
A2: J3.10 R21.1 | length 6.6
  Top Layer w0.254: J3.10 R21.1
A3: J3.09 R2.2 | length 3.4
  Top Layer w0.254: J3.09 R2.2
D4: J3.01 R9.1 | length 3.4
  Top Layer w0.254: J3.01 R9.1
D5: J2.10 R4.2 | length 8.5
  Top Layer w0.254: R4.2 35.941,19.004 36.114,19.177 36.656,19.177 38.647,21.167 38.647,24.55 38.97,24.873 39.007,24.873 39.39,25.256 J2.10
D6: J2.09 R3.2 | length 4.6
  Top Layer w0.254: R3.2 34.437,19.832 36.273,21.668 36.467,21.668 36.85,22.051 J2.09
D9: J2.08 R18.1 | length 7.2
  Top Layer w0.254: R18.1 33.147,20.828 34.036,21.717 34.036,25.425 J2.08
D10: J2.07 R12.2 | length 3.5
  Top Layer w0.254: R12.2 J2.07
D11: J2.06 R14.2 | length 7.5
  Top Layer w0.254: R14.2 29.23,21.189 28.321,22.098 28.321,24.257 28.847,24.783 28.847,25.316 J2.06
D12: J2.05 R7.2 | length 3.5
  Top Layer w0.254: R7.2 26.67,22.474 J2.05
D13: J2.04 R8.2 | length 6.7
  Top Layer w0.254: R8.2 J2.04
D24: J3.08 R22.1 | length 6.6
  Top Layer w0.254: J3.08 R22.1
D25: J3.07 R20.1 | length 3.4
  Top Layer w0.254: J3.07 R20.1
DBG_RF-BUSY: R20.2 SMD1.27 | length 24
  Top Layer w0.254: R20.2 29.21,10.977 v3(29.502,11.269)
  Bottom Layer w0.254: SMD1.27@14.281,4.838 14.097,5.022 14.097,9.906 17.145,12.954 27.818,12.954 v3(29.502,11.269)
DBG_RF-NRST: R22.2 SMD1.28 | length 17
  Top Layer w0.254: v3(25.4,9.906) 25.421,9.927 26.649,9.927 R22.2
  Bottom Layer w0.254: SMD1.28@16.313,4.838 16.313,5.531 14.859,6.985 14.859,9.017 15.748,9.906 v3(25.4,9.906)
DBG_SWCLK: J4.4 SMD1.25 | length 11.6
  Bottom Layer w0.254: J4.4 4.658,13.843 7.571,10.929 10.533,10.929 11.282,10.18 11.282,9.292 11.749,8.825 12.369,8.825 12.592,8.602 SMD1.25@12.592,8.509
DBG_SWDIO: J4.2 SMD1.26 | length 13.2
  Bottom Layer w0.254: J4.2 5.435,10.948 5.435,8.636 8.068,6.004 12.369,6.004 12.592,6.227 SMD1.26@12.592,6.477
DBG_SWO: R18.2 R23.2 SMD1.23 | length 34.2
  Top Layer w0.254: v8(25.974,16.195) 26.169,16.195 26.23,16.256 32.502,16.256 33.147,16.901 R18.2
  Bottom Layer w0.254: R23.2 10.16,18.415 10.922,17.653 10.922,12.954 11.303,12.573 12.192,12.573 12.355,12.736 13.752,12.736 17.211,16.195 v8(25.974,16.195)
EN: J2.02 Q2.1 | length 26.8
  Top Layer w0.254: J2.02 19.304,25.465 19.304,19.304 18.415,18.415 16.002,18.415 15.367,17.78 15.367,16.011 17.024,14.354 20.965,14.354 21.588,13.731 Q2.1
F_3V3: J3.14 J3.15 J4.1 J6.1 J7.2 pad.3 R30.1 SMD1.30 SMD1.31 SMD1.32 | length 117.9
  Top Layer w0.254: v3(2.921,9.144) 5.461,9.144 J3.15@8.509,6.096 ; v3@48.928,13.589 v3(49.022,13.589)
  Top Layer w0.4: J3.14@11.43,1.765 12.687,0.508 37.883,0.508 38.481,1.106 38.481,2.758 38.222,3.017 38.222,3.793 v3(38.189,3.826) ; J7.2 48.539,13.978 v3@48.928,13.589
  Top Layer w0.6: J3.15@8.89,4.97 9.1,4.76 J3.15@9.32,4.76
  Top Layer w0.8: J3.15@8.89,5.855 9,5.965 9.14,5.965 11.176,8.001 16.112,8.001 v9(16.202,8.091) ; J3.15@9.32,4.76 11.43,2.65 J3.14 J3.14@11.43,1.765
  Bottom Layer w0.254: J4.1 1.905,12.573 1.397,12.065 1.397,10.668 v3(2.921,9.144) ; J6.1@38.185,6.448 J6.1
  Bottom Layer w0.4: SMD1.30@19.977,4.688 20.127,4.838 SMD1.30@20.37,4.838 ; SMD1.30@20.377,4.838 SMD1.30@20.37,4.838 ; SMD1.31@22.409,4.838 22.259,4.838 21.382,5.715 ; SMD1.32@24.441,4.838 24.291,4.838 23.414,5.715 21.382,5.715 ; 37.465,21.979 37.465,21.313 41.866,16.912 41.959,16.912 R30.1 42.134,16.812 42.234,16.712 42.234,16.211 43.198,15.248 43.198,10.142 44.323,9.017 47.752,9.017 49.022,7.747 ; J6.1@38.185,6.448 38.189,6.443 v3(38.189,3.826) 39.221,2.794 49.022,2.794 50.165,3.937 50.165,6.604 49.022,7.747 ; v3(49.022,13.589) 49.022,7.747 ; SMD1.30@20.37,4.838 20.32,4.888 20.32,5.715 21.382,5.715
  Bottom Layer w0.6: J4.1@2.54,12.522 J4.1
  Bottom Layer w0.8: v9(16.202,8.091) 16.292,8.001 18.034,8.001 20.32,5.715
F_MISO: J3.04 R11.1 | length 6.6
  Top Layer w0.254: J3.04 R11.1
F_MOSI: J3.05 R13.1 | length 3.4
  Top Layer w0.254: J3.05 R13.1
F_NRST: J3.16 R17.2 | length 15.8
  Top Layer w0.254: R17.2 5.842,10.333 5.669,10.16 1.778,10.16 1.277,9.659 1.277,8.629 1.905,8.001 4.191,8.001 6.35,5.842 J3.16
F_RX: J3.03 R5.1 | length 3.4
  Top Layer w0.254: J3.03 R5.1@39.37,8.813
F_SCK: J3.06 R10.1 | length 7.6
  Top Layer w0.254: J3.06 31.75,2.65 32.133,3.033 32.37,3.033 32.766,3.429 32.766,5.48 31.75,6.496 R10.1
F_TX: J3.02 R6.1 | length 6.9
  Top Layer w0.254: R6.1 41.91,8.213 J3.02
GND: C1.1 C2.1 C3.2 C4.2 C5.2 J1.2 J1.3 J3.13 J4.5 J5.1 J6.4 J7.1 MP1.1 pad.MH3 pad.MH4 Q2.2 R24.1 R25.2 R26.2 R27.2 R28.2 SMD1.6 SMD1.13 SMD1.14 SMD1.15 SMD1.16 SMD1.17 SMD1.19 SMD1.20 SMD1.21 SMD1.29 SW1.1 SW1.G1 SW1.G2 SW1.G3 SW1.G4 U1.B1 U1.C1 | length 4.3
  Top Layer w0.254: v5(10.015,21.954) 10.024,21.963 11.01,21.963 C3.2 ; v5(10.142,25.25) 10.154,25.261 11.006,25.261 C2.1
  Bottom Layer w0.254: R27.2@40.259,28.788 R26.2 41.311,28.824 42.636,28.824 R25.2
  other v1: 2.51,1.781 4.51,1.781 8.51,1.781 18.51,1.781 30.51,1.781 40.51,1.781 44.51,1.781 48.51,1.781 3.51,3.781 5.51,3.781 7.51,3.781 39.51,3.781 43.51,3.781 4.51,5.781 5.51,7.781 25.51,7.781 47.51,7.781 8.51,9.781 30.51,9.781 46.51,9.781 6.51,13.781 8.51,13.781 16.51,13.781 18.51,13.781 20.51,13.781 7.51,15.781 33.51,15.781 2.51,17.781 4.51,17.781 8.51,17.781 14.51,17.781 3.51,19.781 13.51,19.781 15.51,19.781 27.51,19.781 43.51,19.781 4.51,21.781 6.51,21.781 18.51,21.781 20.51,21.781 5.51,23.781 7.51,23.781 9.51,23.781 39.51,23.781 2.51,25.781 32.51,25.781 36.51,25.781 48.51,25.781 5.51,27.781 25.51,27.781 31.51,27.781 39.51,27.781 47.51,27.781 49.51,27.781
  other v2: 10.528,21.198 11.18,21.198 11.832,21.198 12.485,21.198 13.137,21.198 13.79,21.243 14.274,21.682 14.691,22.187 10.271,22.724 10.923,22.724 14.716,22.84 10.795,23.292 14.381,23.402 13.888,23.831 13.234,23.855 10.795,23.945 13.234,24.507 10.795,24.597 13.234,25.16 12.707,25.53 10.984,26.117 12.839,26.373 13.492,26.373 14.144,26.373 14.797,26.373 14.797,28.33 9.235,28.885 14.797,28.983 11.866,29.409
  other v4: 10.142,24.597 10.154,25.914 9.527,26.379 9.235,26.928 14.797,27.025 9.235,27.58 14.797,27.678 9.235,28.233
  other v5: 35.179,16.383
I2C_SCL: R16.2 SMD1.34 | length 24.1
  Top Layer w0.254: v3(39.624,15.113) 39.624,16.129 41.769,18.274 41.769,18.697 R16.2
  Bottom Layer w0.254: SMD1.34@28.505,4.838 28.886,5.219 28.886,5.391 29.464,5.969 31.115,5.969 32.041,5.043 32.998,5.043 33.909,5.954 33.909,9.652 34.594,10.337 36.626,10.337 37.592,11.303 37.592,13.081 v3(39.624,15.113)
I2C_SDA: R15.2 SMD1.33 | length 28.8
  Top Layer w0.254: v3(40.894,14.859) 40.894,15.612 43.779,18.497 R15.2
  Bottom Layer w0.254: SMD1.33@26.814,4.659 26.814,3.92 27.559,3.175 32.094,3.175 32.698,3.778 33.242,3.778 33.904,4.44 33.904,5.063 34.429,5.588 35.687,5.588 36.672,6.573 36.672,8.351 38.481,10.16 38.481,12.192 40.021,13.732 40.529,13.732 40.894,14.097 v3(40.894,14.859)
LPUART_RX: J6.2 R6.2 SMD1.4 | length 18.6
  Top Layer w0.254: v3(36.576,11.938) 38.1,11.938 38.677,12.515 40.952,12.515 41.275,12.192 v3(41.275,10.668) R6.2
  Bottom Layer w0.254: SMD1.4 32.511,14.69 33.324,14.69 34.217,13.797 34.217,11.833 34.686,11.364 35.935,11.364 36.508,11.938 v3(36.576,11.938) ; J6.2 40.73,10.123 v3(41.275,10.668)
LPUART_TX: J6.3 R5.2 SMD1.5 | length 25.2
  Top Layer w0.254: R5.2 39.373,9.951 39.373,10.704 39.624,10.955 v3(39.624,11.049)
  Bottom Layer w0.254: SMD1.5@32.131,17.145 32.934,17.145 34.077,18.288 38.735,18.288 42.071,14.952 42.071,13.762 41.569,13.261 41.569,12.025 ; v3(39.624,11.049) 39.67,11.095 39.67,11.73 39.965,12.025 41.569,12.025 ; J6.3 43.27,7.528 42.887,7.911 42.816,7.911 42.237,8.49 42.237,11.357 41.569,12.025
NetC2_2: C2.2 J1.1 L1.2 | length 2.1
  Top Layer w0.6: L1.2@11.938,24.362 C2.2 J1.1
NetC3_1: C3.1 L1.1 SMD1.18 | length 3.9
  Top Layer w0.6: L1.1@11.938,22.866 C3.1 12.928,21.971 13.563,22.606 v10(13.589,22.606)
  Bottom Layer w0.6: SMD1.18@12.592,22.733 12.592,22.719 12.642,22.669 13.526,22.669 v10(13.589,22.606)
NetC5_1: C5.1 pad.1 U1.C2 U1.D2 | length 4.6
  Bottom Layer w0.15: U1.D2 U1.C2
  Bottom Layer w0.6: pad.1@37.451,24.423 37.451,25.454 38.805,26.808 40.107,26.808 C5.1
NetD1_1: D1.1 D2.1 Q1.3 R1.1 | length 18.5
  Top Layer w0.6: D1.1@17.018,16.916 21.61,16.916 D2.1 21.61,16.855 23.484,14.981 R1.1 Q1.3
NetJ4_6: J4.6 R23.1 R24.2 | length 6.1
  Bottom Layer w0.254: J4.6 5.207,15.113 5.8,15.706 R23.1 R24.2
NetL2_1: L2.1 U1.A1
NetL2_2: L2.2 U1.D1
NetQ1_1: Q1.1 Q2.3 R1.2 | length 6.8
  Top Layer w0.6: Q2.3 R1.2 35.534,13.081 36.474,14.021 Q1.1
NetR7_1: R7.1 SMD1.11 | length 7.9
  Top Layer w0.254: v3@25.335,20.741 25.335,18.607 26.077,17.865 R7.1
  Bottom Layer w0.254: v3@25.335,20.741 v3(25.335,20.828) 25.335,22.414 26.428,23.507 SMD1.11@26.428,24.438
NetR8_1: R8.1 SMD1.12 | length 7.8
  Top Layer w0.254: v3(23.114,20.828) 23.114,18.415 23.618,17.911 24.126,17.911 R8.1@24.15,17.887
  Bottom Layer w0.254: v3(23.114,20.828) 23.114,22.352 24.384,23.622 SMD1.12@24.384,24.438
NetR19_2: R19.2 SMD1.1 | length 15.1
  Top Layer w0.254: v3(19.786,11.438) 19.799,11.425 19.799,9.961 R19.2
  Bottom Layer w0.254: v3(19.786,11.438) 19.88,11.438 20.166,11.152 27.964,11.152 30.541,8.575 SMD1.1@32.192,8.575
NetR21_2: R21.2 SMD1.0 | length 12.4
  Top Layer w0.254: R21.2 22.145,9.948 22.749,9.344 22.749,8.926 v3(22.793,8.882)
  Bottom Layer w0.254: v3(22.793,8.882) 22.793,8.83 24.765,6.858 32.113,6.858 32.192,6.779 SMD1.0@32.356,6.779
NetR25_1: R25.1 U1.B2 | length 4.2
  Top Layer w0.15: v6(42.164,28.321) 41.402,28.321 41.148,28.067 41.148,27.051 41.961,26.238 v7(42.176,26.238)
  Bottom Layer w0.254: v6(42.164,28.321) 42.176,28.321 42.276,28.222 42.599,28.222 42.672,28.149 R25.1
NetR26_1: R26.1 U1.C3 | length 1.7
  Bottom Layer w0.15: R26.1 41.352,28.031 41.352,27.609 41.826,27.135 U1.C3
NetR27_1: R27.1 U1.D3 | length 2
  Bottom Layer w0.15: R27.1@40.259,28.108 40.239,28.088 41.35,26.976 41.35,26.714 U1.D3
NRST: C1.2 J4.3 R17.1 SMD1.35 SW1.2 | length 60.3
  Top Layer w0.254: v3(1.378,13.753) 2.757,13.753 5.038,11.472 R17.1 ; SW1.2 7.79,27.334 8.726,26.398 C1.2 8.726,21.172 5.842,18.288 R17.1 ; v3(31.623,4.191) 30.861,4.191 30.099,3.429 28.448,3.429 27.813,4.064 27.813,8.001 27.94,8.128 27.94,10.795 27.432,11.303 22.225,11.303 20.701,12.827 18.669,12.827 17.314,11.472 R17.1
  Bottom Layer w0.254: v3(1.378,13.753) 1.423,13.798 2.495,13.798 J4.3 ; SMD1.35@30.537,4.838 30.76,4.615 31.028,4.615 31.386,4.257 31.557,4.257 v3(31.623,4.191)
SCL: J2.11 J7.4 R16.1 | length 17.7
  Top Layer w0.254: J2.11 41.91,22.474 R16.1 41.91,19.863 41.737,19.69 41.261,19.69 38.608,17.037 38.608,14.478 39.32,13.766 42.087,13.766 44.126,15.805 45.256,15.805 J7.4
SDA: J2.12 J7.3 R15.1 | length 13.8
  Top Layer w0.254: J2.12 44.762,25.406 R15.1 44.801,19.558 45.466,19.558 47.244,17.78 47.244,15.367 46.855,14.978 J7.3
SPI_MISO: R11.2 SMD1.2 | length 7.8
  Top Layer w0.254: v3(33.189,10.106) 33.167,10.128 33.167,10.787 32.966,10.988 32.966,11.554 33.351,11.938 34.621,11.938 36.368,10.192 36.657,10.192 36.83,10.019 R11.2
  Bottom Layer w0.254: SMD1.2@32.192,10.607 32.192,10.357 32.415,10.134 33.161,10.134 v3(33.189,10.106)
SPI_MOSI: R13.2 SMD1.22 | length 27.9
  Top Layer w0.254: v3(33.593,11.294) 33.687,11.294 33.973,11.008 34.11,11.008 34.29,10.828 R13.2
  Bottom Layer w0.2: SMD1.22@12.585,14.723 12.94,15.078 13.3,15.078 16.002,17.78 27.432,17.78 31.535,13.677 33.208,13.677 33.641,13.244 33.641,11.341 v3(33.593,11.294)
SPI_NSS: R9.2 SMD1.24 | length 52.7
  Top Layer w0.254: R9.2 44.619,9.779 45.571,9.779 45.974,9.376 v3(45.974,1.397)
  Bottom Layer w0.2: SMD1.24@12.592,10.541 12.815,10.318 12.815,10.045 13.462,9.398 13.462,5.715 12.573,4.826 12.573,3.441 13.335,2.679 13.335,1.819 14.265,0.889 45.466,0.889 v3(45.974,1.397)
SPI_SCK: R10.2 SMD1.3 | length 3.2
  Top Layer w0.254: v3(31.115,11.049) 31.181,10.983 31.181,10.592 31.75,10.023 R10.2
  Bottom Layer w0.254: v3(31.115,11.049) 31.181,11.115 31.181,11.623 31.724,12.166 SMD1.3@32.219,12.166
VBAT: D1.2 J2.01 | length 2.7
  Top Layer w0.6: J2.01 16.53,22.051 17.018,21.563 D1.2@17.018,19.975
VBUS: D2.2 J2.03 | length 2.6
  Top Layer w0.6: D2.2 J2.03
VDD: C4.1 Q1.2 U1.A2 | length 18.9
  Top Layer w0.5: Q1.2 36.812,16.016 37.244,16.016 37.537,16.309 37.537,17.914 40.259,20.636 40.259,23.749 41.402,24.892 42.418,24.892 43.114,25.588 43.114,27.126 43.293,27.305 43.674,27.686 v3(45.339,27.686)
  Bottom Layer w0.6: C4.1 44.289,26.813 44.378,26.902 44.378,27.425 v3(44.639,27.686) v3(45.339,27.686)
VPA_EN: J5.2 R14.1 R28.1 SMD1.9 U1.A3 | length 52.9
  Top Layer w0.254: v3(28.067,20.828) 28.067,18.161 28.363,17.865 R14.1
  Bottom Layer w0.15: SMD1.9@30.492,24.438 30.492,25.92 30.988,26.416 30.988,28.095 32.071,29.179 R28.1 ; R28.1@38.01,29.25 38.456,29.25 38.681,29.475 43.18,29.475 43.593,29.062 43.593,29.021 ; U1.A3 42.526,26.829 43.593,27.896 43.593,29.021 ; J5.2 46.155,13.897 47.298,13.897 49.784,16.383 49.784,19.812 48.656,20.94 46.751,20.94 45.914,21.777 45.914,24.705 46.71,25.501 46.71,28.109 45.798,29.021 43.593,29.021
  Bottom Layer w0.254: v3(28.067,20.828) 29.21,20.828 30.492,22.11 SMD1.9@30.492,24.438
VPA_SEL: J5.3 R12.1 R30.2 SMD1.10 U1.B3 | length 53.1
  Top Layer w0.2: R12.1 30.903,17.865 30.332,18.436 30.332,22.246 v3(29.464,23.114) 31.17,24.82 31.17,26.598 33.782,29.21 42.672,29.21 43.046,28.836 43.06,28.836 ; v6(41.964,27.74) 42.446,27.74 43.06,28.354 43.06,28.836 ; v3(47.017,19.963) 46.001,20.98 46.001,24.157 46.609,24.765 46.609,28.103 45.502,29.21 43.434,29.21 43.06,28.836
  Bottom Layer w0.12: v6@41.964,27.699 42.189,27.475 42.189,26.614 42.179,26.605 U1.B3@42.179,26.597 ; U1.B3 U1.B3@42.176,26.593
  Bottom Layer w0.15: v6@41.964,27.699 v6(41.964,27.74) ; U1.B3@42.176,26.593 U1.B3@42.179,26.597
  Bottom Layer w0.254: SMD1.10@27.987,24.661 28.21,24.438 28.46,24.438 28.71,24.438 28.933,24.215 28.933,23.645 v3(29.464,23.114) ; R30.2 43.915,16.812 44.262,16.465 44.262,16.385 44.645,16.002 47.625,16.002 48.641,17.018 48.641,19.431 48.109,19.963 v3(47.017,19.963)
VPA_VDD: J5.4 pad.2 SMD1.7 SMD1.8 | length 18.7
  Bottom Layer w0.4: SMD1.7@32.192,20.767 SMD1.8@32.192,22.799
  Bottom Layer w0.6: SMD1.8@32.192,22.799 SMD1.8@32.242,22.849 ; SMD1.8@32.242,22.999 SMD1.8@32.419,22.999
  Bottom Layer w0.8: SMD1.8@32.242,22.849 SMD1.8@32.242,22.999 ; SMD1.8@32.419,22.999 32.788,23.368 37.09,23.368 38.647,23.368 39.116,22.899 39.116,21.451 42.025,18.542 J5.4
pads on no net: J4.H1 J4.H2 J4.H3 J7.S1 J7.S2 R2.1 R3.1 R4.1 R29.1

## Polygon pours and split planes (outlines as drawn)
GND on Top Layer "GND_L01_P000" (solid, remove dead copper, pour order 0): 0,0 0.127,-0.127 50.927,-0.127 50.927,30.099 50.8,30.226 0,30.226
GND on Bottom Layer "GND_L02_P001" (solid, remove dead copper, pour order 1): 0,0 0.127,-0.127 50.927,-0.127 50.927,30.099 50.8,30.226 0,30.226

## Keep-outs
Keep-Out Layer:
  lines w0.1: 50.8,27.41 ccw(c48.26,27.41) 48.26,29.95 2.754,30 ccw(c2.754,27.246) 0,27.246 0,2.54 ; 50.8,27.432 50.8,2.54 ; 0,2.54 ccw(c2.54,2.54) 2.54,0 ; 0,2.54 ccw(c2.54,2.54) 2.54,0 ; 2.54,0 48.26,0 ; 2.54,0 48.26,0 ; 48.26,0 ccw(c48.26,2.54) 50.8,2.54 ; 48.26,0 ccw(c48.26,2.54) 50.8,2.54

## Other copper
Bottom Layer:
  region: 37.332,23.908 37.332,23.114 37.598,23.114 37.598,23.908
  region net NetC5_1: 37.211,24.606 37.211,23.511 37.719,23.511 37.719,24.606
  region net NetL2_2: 41.399,25.89 41.399,24.82 40.475,23.896 40.548,23.822 41.273,23.822 41.273,23.859 41.656,24.242 41.656,25.654 41.572,25.751 41.547,25.793 41.547,25.899
  region net NetL2_1: 42.599,25.904 42.599,24.834 43.373,23.909 43.351,23.773 42.725,23.836 42.55,23.848 42.342,24.256 42.342,25.668 42.426,25.765 42.451,25.807 42.451,25.913
  region net NetC5_1: 41.468,26.167 40.949,26.167 40.779,26.238 40.644,26.373 40.457,26.518 40.473,27.149 41.351,26.301 41.472,26.301
  region net VDD: 42.528,26.156 42.536,26.156 43.473,26.156 43.81,26.456 43.892,27.185 43.707,27.185 43.201,26.763 42.814,26.483 42.654,26.343 42.603,26.32 42.519,26.32

## Silkscreen, mask and mechanical layers (free items; w line width, h text height)
Bottom Overlay:
  drawing of 46 lines, arcs and shapes, not listed
  text "VPA_VDD" at 43.234,18.147 h1
  text "Wings-Argos" at 4.089,18.107 h1 r270
  text "V1.1" at 2.169,17.663 h1 r270
  text ".SN" at 0.528,17.611 h1 r270
  text "VPA_SEL" at 43.234,14.972 h1
  text "VPA_EN" at 43.107,12.94 h1
  text "GND" at 42.98,10.995 h1
  text "3V3" at 39.297,8.963 h1
  text "RX" at 41.583,8.963 h1
  text "TX" at 44.123,8.963 h1
  text "GND" at 46.809,6.677 h1 r270
Bottom Solder:
  region: 37.084,23.114 37.084,22.606 37.846,22.606 37.846,23.114
  region: 37.084,24.13 37.084,23.622 37.846,23.622 37.846,24.13
  region: 37.338,26.493 37.338,25.985 38.1,25.985 38.1,26.493
Mechanical 1:
  drawing of 243 lines, arcs and shapes, not listed
  text "Layer" at 62.42,28.384 h1.52
  text "Name" at 72.832,28.384 h1.52
  text "Material" at 106.605,28.384 h1.52
  text "Thickness" at 121.841,28.384 h1.52
  text "Constant" at 138.347,28.384 h1.52
  text "Board Layer Stack" at 152.821,28.384 h1.52
  text "Top Overlay" at 72.832,25.336 h1.52
  text "Top Solder" at 72.832,22.288 h1.52
  text "SM-001" at 106.605,22.288 h1.52
  text "1,00mil" at 121.841,22.288 h1.52
  text "4" at 138.347,22.288 h1.52
  text "Top Surface Finish" at 72.832,19.241 h1.52
  text "PbSn" at 106.605,19.241 h1.52
  text "0,79mil" at 121.841,19.241 h1.52
  text "1" at 62.42,16.192 h1.52
  text "Top Layer" at 72.832,16.192 h1.52
  text "CF-004" at 106.605,16.192 h1.52
  text "1,38mil" at 121.841,16.192 h1.52
  text "Dielectric 1" at 72.832,13.144 h1.52
  text "Core-043" at 106.605,13.144 h1.52